# Altium PCB 智能睡眠枕.PcbDoc
Units mil, origin at the board's own origin, x right, y up, seen from the top; angles counter-clockwise.
Board outline 3890 x 5875 mil, 2 copper layers (Top Layer, Bottom Layer); 35 components, 43 nets, 196 pads, 6 vias.
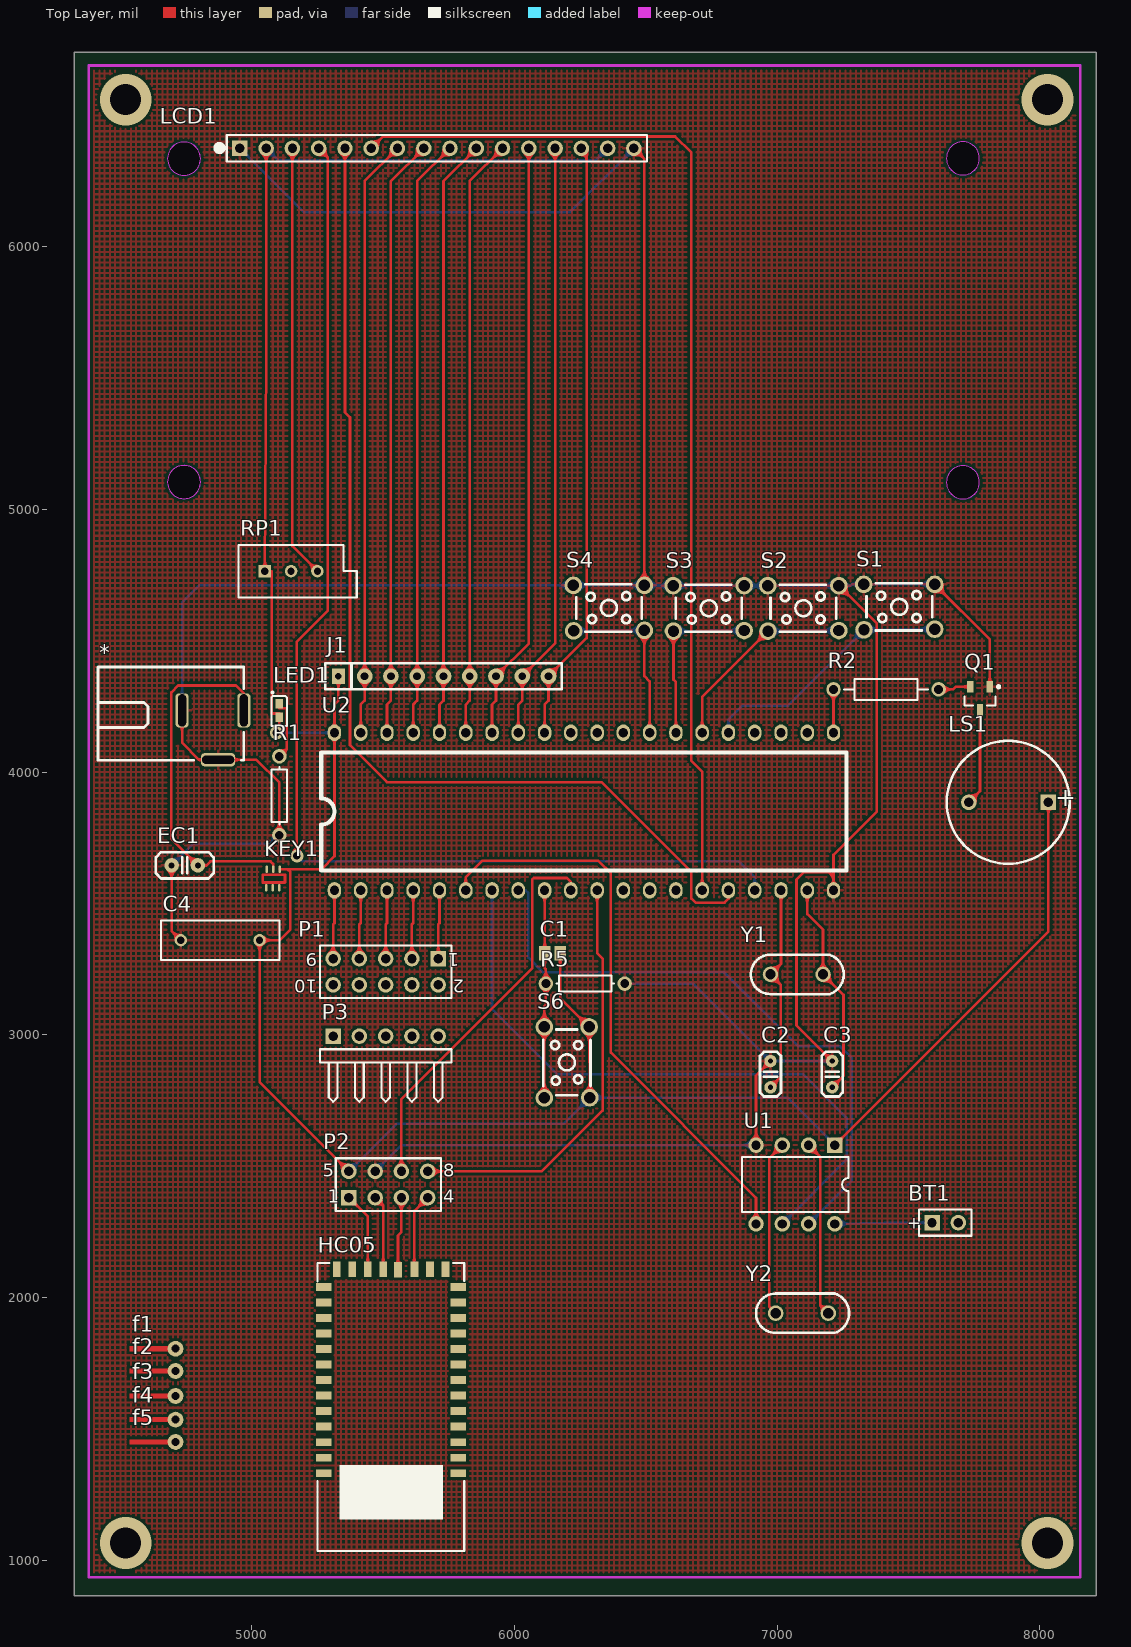
[diagram p0: Top Layer view]
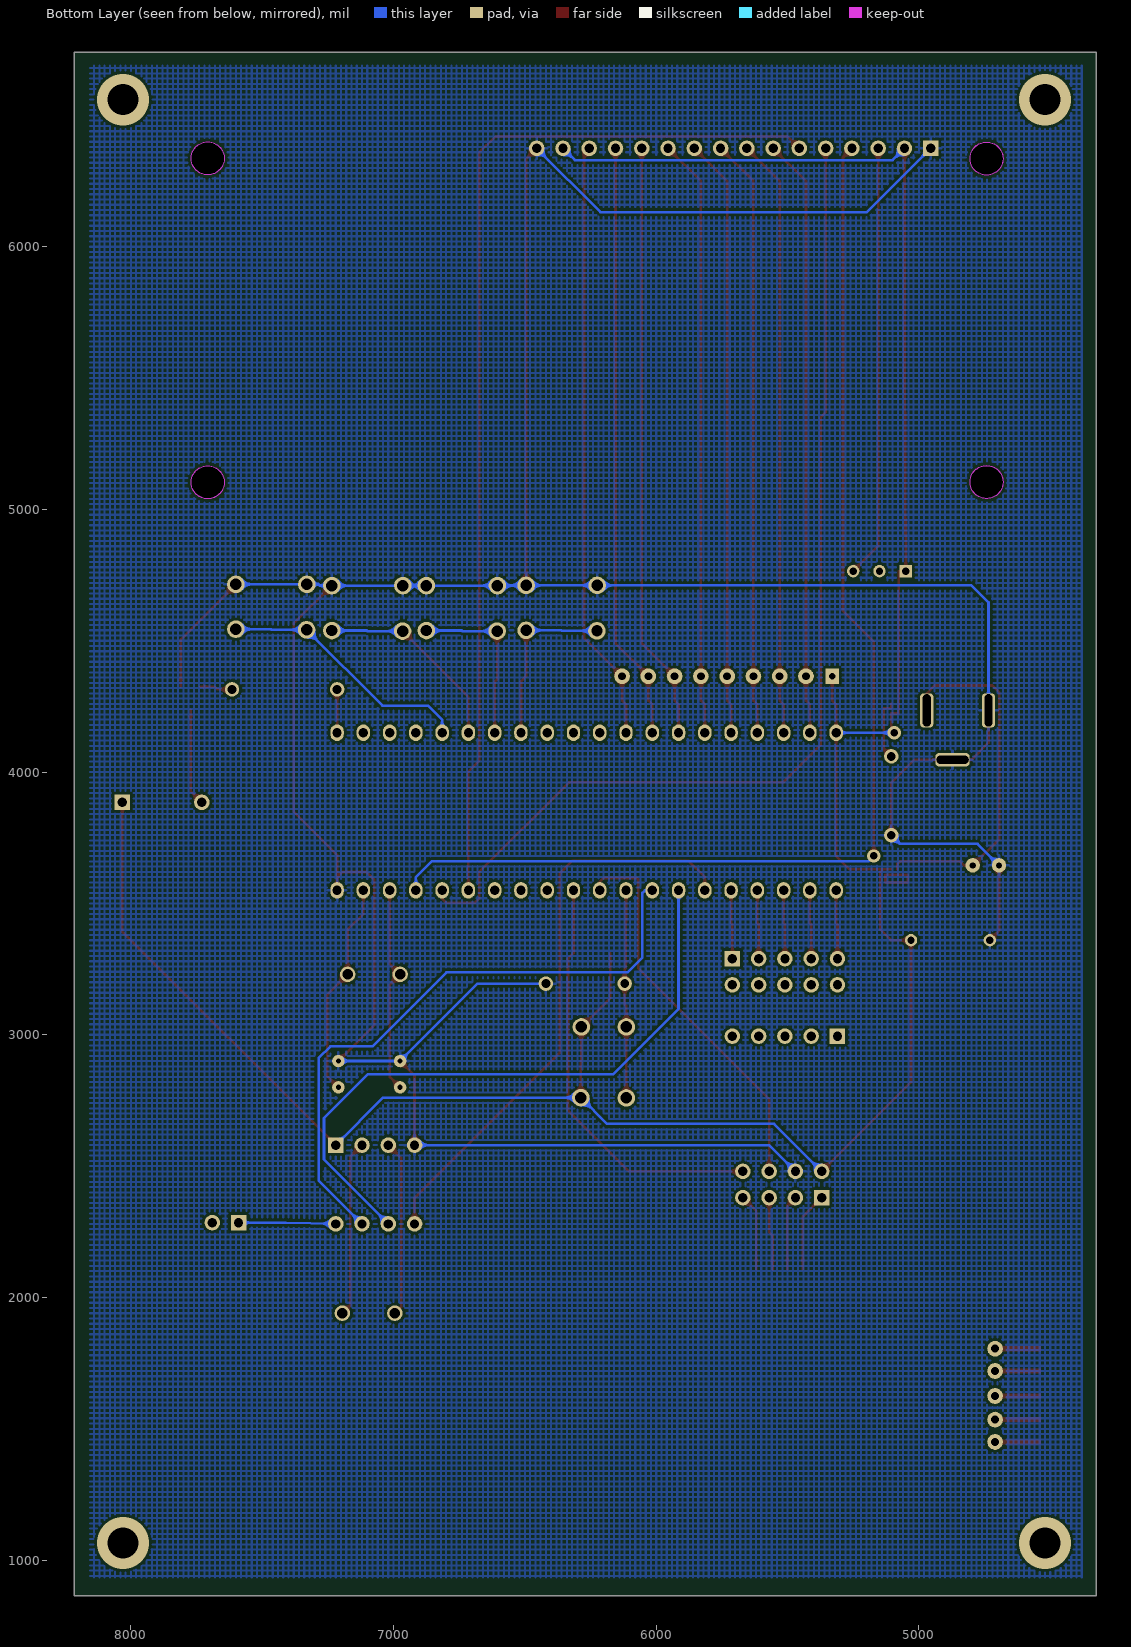
[diagram p1: Bottom Layer view, seen from below]

## Layer stack, top to bottom
Top Solder: solder mask 0.4, Solder Resist, Dk 3.5
Top Layer: signal copper 1.4
Dielectric 1: dielectric 12.6, FR-4, Dk 4.8
Bottom Layer: signal copper 1.4
Bottom Solder: solder mask 0.4, Solder Resist, Dk 3.5

## Board outline
4325,865 8215,865 8215,6740 4325,6740

## Design rules (kind name [scope] priority, off if disabled: settings)
Clearance [All] p1: gap=10 ignorepadtopadclearanceinfootprint=FALSE
PolygonConnect [All] p1: connectstyle=Relief reliefconductorwidth=10 reliefentries=4 polygonreliefangle="90 Angle" airgapwidth=10
RoutingVias [All] p1: holewidth=28 width=50 viastyle="Through Hole" minholewidth=28 minwidth=50 maxholewidth=28 maxwidth=50
SolderMaskExpansion [All] p1: expansion=4
Width [All] p1: maxlimit=10 minlimit=10 preferedwidth=10
30 further rules are at their usual default settings.

## Components (designator, comment, footprint, x,y, rotation, side; value= is the part's Value field where it differs from the comment)
* "Component_1" PCBComponent_1#1 4735,4235 r270 top
BT1 "Battery" BAT-2 7640,2285 r0 top
C1 "Cap Pol3" C0805 6145,3310 r180 top value=10uF
C2 "30P" Capacitor-Disk-Small 6975,2850 r270 top
C3 "30P" Capacitor-Disk-Small 7210,2850 r270 top
C4 "Cap" RAD-0.3 4880,3360 r0 top value=0.1uf/50v
EC1 "Cap Pol2" Capacitor-Disk-Middle 4795,3645 r180 top value=220uF/16V
f1 "fsr402" PCBComponent_1#2 4445,2380 r270 top
f2 "fsr402" PCBComponent_1#2 4445,2295 r270 top
f3 "fsr402" PCBComponent_1#2 4445,2200 r270 top
f4 "fsr402" PCBComponent_1#2 4445,2110 r270 top
f5 "fsr402" PCBComponent_1#2 4445,2025 r270 top
HC05 "U1" HC-0x 5786.81,1330.94 r180 top
J1 "10K" RES-PACK-DIP9 5330,4365 r90 top
KEY1 "Component_1" "PCBComponent_1 - duplicate1" 5176.89,3565 r90 top
LCD1 "LCD1602" LCD1602 5705,6375 r180 top
LED1 "LED Chip" CLED1005-0402 5105,4235 r90 top
LS1 "BUZZ" BUZZER_12*9.5 7730,3885 r0 top
P1 "Header 5X2" HDR2X5 5710,3290 r180 top
P2 "Header 4X2A" HDR2X4_CEN 5370,2380 r0 top
P3 "Header 5H" HDR1X5H 5310,2995 r0 top
Q1 "PNP" SOT-23B_N 7772.6,4280.71 r270 top
R1 "Res1" AXIAL-0.3 5105,3910 r90 top value=510/0.125w
R2 "2.2k" AXIAL-0.4-R 7415,4315 r180 top
R5 "10K" AXIAL-0.3 6270,3195 r180 top
RP1 "RPot" VR5 5150,4765 r0 top value=10K
S1 "Tactile Switch" BUTTON_6*6 7600.37,4544 r180 top
S2 "Tactile Switch" BUTTON_6*6 7235,4539 r180 top
S3 "Tactile Switch" BUTTON_6*6 6875,4539 r180 top
S4 "Tactile Switch" BUTTON_6*6 6495,4540 r180 top
S6 "Tactile Switch" BUTTON_6*6 6285,3030 r270 top
U1 "DS1302" DIP-8 7220,2580 r180 top
U2 "STC89C52_DIP" DIP-40 5315,3550 r0 top
Y1 "Crystal" cry卧式 6975,3230 r0 top
Y2 "32768" cry卧式 6995,1940 r0 top

## Footprints (in the part's own frame and the unit in brackets; to place one, negate y for a bottom-side part, rotate by r counter-clockwise, add the part's x,y. Pads: shape width x height; smd on the part's side, far side on the other; paste and mask are expansions set on the pad)
AXIAL-0.3 [mm] "Axial Device, Thru-Hole; 2 Leads; 0.3 in Pin Spacing"
  round 1.4 hole 0.85: 1(-3.81,0) 2(3.81,0)
  silkscreen extent -2.77,-0.76 2.77,0.76
AXIAL-0.4-R [mm] "1/4W/1/2W"
  round 1.4 hole 0.85: 1(-5.08,0) 2(5.08,0)
  silkscreen extent -4.06,-1.02 4.06,1.02, body extent -5.38,-1.26 5.38,1.26, height 2.48
BAT-2 [mm] "Battery; 2 Leads"
  rect 1.5x1.5 hole 0.9: 1(-1.27,0)
  round 1.5 hole 0.9: 2(1.27,0)
  silkscreen extent -2.54,-1.27 2.54,1.27
BUTTON_6*6 [mm] "轻触按键"
  round 1.7 hole 1.1: 1(0,0) 1(6.842,0.051) 2(0,-4.343) 2(6.867,-4.343)
  silkscreen extent 0.25,-4.44 6.6,0.13, body extent -0.48,-5.01 7.49,0.99, height 5.26
BUZZER_12*9.5 [mm] "12*9.5mm"
  rect 1.5x1.5 hole 0.9: 1(7.696,0)
  round 1.5 hole 0.9: 2(0,0)
  silkscreen extent -2.13,-5.94 9.75,5.94, body extent -2.14,-5.97 9.86,6.02, height 7.5
C0805 [mm] "Chip Capacitor, Body 2.0x1.3mm, IPC High Density"
  rect 1.1x1.4 smd: 1(-0.75,0) 2(0.75,0)
  body extent -1.1,-0.72 1.1,0.72, height 1.4
Capacitor-Disk-Middle [mm]
  round 1.4 hole 0.6: 1(0,0) 2(2.54,0)
  silkscreen extent -1.52,-1.27 4.06,1.27, body extent -1.23,-1.1 3.77,1, height 7
Capacitor-Disk-Small [mm]
  round 1.2 hole 0.5: 1(-1.27,0) 2(1.27,0)
  silkscreen extent -2.16,-1.02 2.16,1.02, body extent -2,-1.1 2,1, height 6.5
CLED1005-0402 [mm]
  rect 0.9x0.7 smd: 1(-0.65,0) 2(0.65,0)
  silkscreen extent -1.5,-0.75 1.78,0.75, body extent -0.5,-0.25 0.5,0.25, height 0.4
cry卧式 [mm]
  round 1.5 hole 1: 1(0,0) 2(5.08,0)
  silkscreen extent -1.9,-1.91 7.08,1.91, body extent -3.13,-2.32 8.22,2.33, height 3.78
DIP-8 [mm]
  rect 1.5x1.5 hole 0.9: 1(0,0)
  round 1.5 hole 0.9: 2(2.54,0) 3(5.08,0) 4(7.62,0) 5(7.62,7.62) 6(5.08,7.62) 7(2.54,7.62) 8(0,7.62)
  silkscreen extent -1.34,1.16 8.96,6.46, body extent -0.82,-0.22 8.45,7.84, height 3.8
DIP-40 [mm] "40脚直插芯片 间距2.54mm 600mil"
  oval 1.3x1.6 hole 0.9: 1(0,0) 2(2.54,0) 3(5.08,0) 4(7.62,0) 5(10.16,0) 6(12.7,0) 7(15.24,0) 8(17.78,0) 9(20.32,0) 10(22.86,0) 11(25.4,0) 12(27.94,0) 13(30.48,0) 14(33.02,0) 15(35.56,0) 16(38.1,0) 17(40.64,0) 18(43.18,0) 19(45.72,0) 20(48.26,0) 21(48.26,15.24) 22(45.72,15.24) 23(43.18,15.24) 24(40.64,15.24) 25(38.1,15.24) 26(35.56,15.24) 27(33.02,15.24) 28(30.48,15.24) 29(27.94,15.24) 30(25.4,15.24) 31(22.86,15.24) 32(20.32,15.24) 33(17.78,15.24) 34(15.24,15.24) 35(12.7,15.24) 36(10.16,15.24) 37(7.62,15.24) 38(5.08,15.24) 39(2.54,15.24) 40(0,15.24)
  silkscreen extent -1.27,1.91 49.53,13.33, body extent -1.22,-1.18 49.48,16.42, height 8.5
HC-0x [mm]
  rect 1.5x0.76 smd: 1(0,0) 2(0,-1.5) 3(0,-3) 4(0,-4.5) 5(0,-6) 6(0,-7.5) 7(0,-9) 8(0,-10.5) 9(0,-12) 10(0,-13.5) 11(0,-15) 12(0,-16.5) 13(0,-18) 22(13,-18) 23(13,-16.5) 24(13,-15) 25(13,-13.5) 26(13,-12) 27(13,-10.5) 28(13,-9) 29(13,-7.5) 30(13,-6) 31(13,-4.5) 32(13,-3) 33(13,-1.5) 34(13,0)
  rect 0.76x1.5 smd: 14(1.26,-19.73) 15(2.76,-19.73) 16(4.26,-19.73) 17(5.842,-19.685) 18(7.26,-19.73) 19(8.76,-19.73) 20(10.26,-19.73) 21(11.76,-19.73)
  silkscreen extent -0.57,-20.32 13.63,7.52
HDR1X5H [mm] "Connector; Header; 5 Position; Right Angle"
  rect 1.5x1.5 hole 0.9: 1(0,0)
  round 1.5 hole 0.9: 2(2.54,0) 3(5.08,0) 4(7.62,0) 5(10.16,0)
  silkscreen extent -1.27,-6.35 11.43,-1.27
HDR2X4_CEN [mm] "Connector; Header; 4x2 Position"
  rect 1.5x1.5 hole 0.9: 1(0,0)
  round 1.5 hole 0.9: 2(2.54,0) 3(5.08,0) 4(7.62,0) 5(0,2.54) 6(2.54,2.54) 7(5.08,2.54) 8(7.62,2.54)
  silkscreen extent -1.27,-1.27 8.89,3.81
HDR2X5 [mm] "Connector; Header; 5x2 Position"
  rect 1.5x1.5 hole 0.9: 1(0,0)
  round 1.5 hole 0.9: 2(0,2.54) 3(2.54,0) 4(2.54,2.54) 5(5.08,0) 6(5.08,2.54) 7(7.62,0) 8(7.62,2.54) 9(10.16,0) 10(10.16,2.54)
  silkscreen extent -1.27,-1.27 11.43,3.81
LCD1602 [mm] "LCD1602"
  rect 1.5x1.5 hole 0.9: 1(19.05,0)
  round 1.5 hole 0.9: 2(16.51,0) 3(13.97,0) 4(11.43,0) 5(8.89,0) 6(6.35,0) 7(3.81,0) 8(1.27,0) 9(-1.27,0) 10(-3.81,0) 11(-6.35,0) 12(-8.89,0) 13(-11.43,0) 14(-13.97,0) 15(-16.51,0) 16(-19.05,0)
  Keep-Out Layer circle w0.1: c-50.867,32.3 r1.6
  Keep-Out Layer circle w0.1: c-50.867,0.974 r1.6
  Keep-Out Layer circle w0.1: c24.451,1 r1.6
  Keep-Out Layer circle w0.1: c24.451,32.274 r1.6
  Keep-Out Layer board cut-out: -52.467,32.3 -52.345,31.687 -51.998,31.168 -51.479,30.821 -50.867,30.7 -50.867,30.7 -50.255,30.821 -49.736,31.168 -49.389,31.687 -49.267,32.3 -49.267,32.3 -49.389,32.912 -49.736,33.431 -50.255,33.778 -50.867,33.9 -50.867,33.9 -51.479,33.778 -51.998,33.431 -52.345,32.912 -52.467,32.3
  Keep-Out Layer board cut-out: -52.467,0.974 -52.345,0.362 -51.998,-0.157 -51.479,-0.504 -50.867,-0.626 -50.867,-0.626 -50.255,-0.504 -49.736,-0.157 -49.389,0.362 -49.267,0.974 -49.267,0.974 -49.389,1.587 -49.736,2.106 -50.255,2.453 -50.867,2.574 -50.867,2.574 -51.479,2.453 -51.998,2.106 -52.345,1.587 -52.467,0.974
  Keep-Out Layer board cut-out: 22.851,1 22.973,0.388 23.32,-0.132 23.839,-0.478 24.451,-0.6 24.451,-0.6 25.063,-0.478 25.582,-0.132 25.929,0.388 26.051,1 26.051,1 25.929,1.612 25.582,2.131 25.063,2.478 24.451,2.6 24.451,2.6 23.839,2.478 23.32,2.131 22.973,1.612 22.851,1
  Keep-Out Layer board cut-out: 22.851,32.274 22.973,31.662 23.32,31.143 23.839,30.796 24.451,30.674 24.451,30.674 25.063,30.796 25.582,31.143 25.929,31.662 26.051,32.274 26.051,32.274 25.929,32.886 25.582,33.406 25.063,33.752 24.451,33.874 24.451,33.874 23.839,33.752 23.32,33.406 22.973,32.886 22.851,32.274
  silkscreen extent -20.32,-1.27 21.47,1.27, body extent -53.46,-1.61 27.04,34.89, height 10.52
PCBComponent_1#1 [mil]
  rrect50% 129.92x50 hole 30 slot 122.05 at 0 deg: 1(0,235) 2(0,0)
  rrect50% 50x129.92 hole 30 slot 122.05 at 90 deg: 3(188,137)
  silkscreen extent -165,-320 190,235
PCBComponent_1#2 [mil]
  round 60 hole 30: 1(575,265)
  Top Layer region: 564.99,89.99 584.99,89.99 584.99,239.99 564.99,239.99
"PCBComponent_1 - duplicate1" [mil]
  oct 29.05x9.92 smd: 1(-5,121.89) 2(-5,96.89) 3(-5,71.89) 4(65,120) 5(65,95) 6(65,70)
  Top Layer lines w10: 15,135 15,50 45,50 45,135 15,135
RAD-0.3 [mm] "Radial Cap, Thru-Hole; 2 Leads; 0.3 in Pin Spacing"
  round 1.2 hole 0.7: 1(-3.81,0) 2(3.81,0)
  silkscreen extent -5.71,-1.91 5.71,1.91
RES-PACK-DIP9 [mil]
  rect 59.06x50 hole 25: 1(0,0)
  round 60 hole 30: 2(0,-100) 3(0,-200) 4(0,-300) 5(0,-400) 6(0,-500) 7(0,-600) 8(0,-700) 9(0,-800)
  silkscreen extent -50,-850 50,50, body extent -61,-832 59,31, height 459
SOT-23B_N [mm] "SOT23, 3-Leads, Body 2.9x1.3mm, Pitch 0.95mm, Lead Span 2.4mm, IPC Medium Density"
  rect 1.15x0.6 smd: 1(-1.125,0.95) 2(-1.125,-0.95) 3(1.125,0)
  silkscreen extent -1.25,-1.5 0.7,1.93, body extent -0.7,-1.5 0.7,1.5, height 1.14
VR5 [mm] "Thru-Hole; 3 Leads"
  rect 1.2x1.2 hole 0.7: 1(-2.54,0)
  round 1.2 hole 0.7: 2(0,0) 3(2.54,0)
  silkscreen extent -5.08,-2.54 6.35,2.54

## Part data
BT1: "Multicell Battery", LatestRevisionDate=17-Jul-2002, LatestRevisionNote="Re-released for DXP Platform.", PackageDescription="Battery; 2 Leads", PackageReference=BAT-2, Published=24-Mar-1999, Publisher="Altium Limited"
C1: "Polarized Capacitor (Surface Mount)", LatestRevisionDate=29-May-2009, LatestRevisionNote="IPC-7351 Footprint Added.", PackageDescription="Chip Capacitor", PackageReference=C0805, Published=8-Jun-2000, Publisher="Altium Limited"
C2 C3: library part CAP, "Capacitor"
C4: "Capacitor", LatestRevisionDate=17-Jul-2002, LatestRevisionNote="Re-released for DXP Platform.", PackageDescription="Radial Cap, Thru-Hole; 2 Leads; 0.3 in Pin Spacing", PackageReference=RAD-0.3, Published=8-Jun-2000, Publisher="Altium Limited"
EC1: "Polarized Capacitor (Axial)", LatestRevisionDate=17-Jul-2002, LatestRevisionNote="Re-released for DXP Platform.", PackageDescription="Polarized Capacitor; 2 Leads", PackageReference=POLAR0.8, Published=8-Jun-2000, Publisher="Altium Limited"
f1 f2 f3 f4 f5: library part COMPONENT_1
HC05: library part Component_1
J1: library part CON9, "Connector"
LED1: "Typical Chip LED", Published=8-Jun-2000, Publisher="Altium Limited", Revision="July-2002: Re-released for DXP Platform."
LS1: "蜂鸣器"
P1: "Header, 5-Pin, Dual row", LatestRevisionDate=17-Jul-2002, LatestRevisionNote="Re-released for DXP Platform.", Publisher="Altium Limited"
P2: "Header, 4-Pin, Dual row", LatestRevisionDate=17-Jul-2002, LatestRevisionNote="Re-released for DXP Platform.", Publisher="Altium Limited"
P3: "Header, 5-Pin, Right Angle", LatestRevisionDate=17-Jul-2002, LatestRevisionNote="Re-released for DXP Platform.", Publisher="Altium Limited"
Q1: "PNP Bipolar Transistor", LatestRevisionDate=29-May-2009, LatestRevisionNote="IPC-7351 Footprint Added.", PackageDescription="3-Pin SOT-23 Package 0.95 mm Pitch, 2.4 mm Lead Span", PackageReference=SOT-23B, PackageVersion=Aug-1999, Published=8-Jun-2000, Publisher="Altium Limited"
R1: "Resistor", LatestRevisionDate=17-Jul-2002, LatestRevisionNote="Re-released for DXP Platform.", PackageDescription="Axial Device, Thru-Hole; 2 Leads; 0.3 in Pin Spacing", PackageReference=AXIAL-0.3, Published=8-Jun-2000, Publisher="Altium Limited"
R2: library part Res2_1/4W, "Resistor 直插电阻 0.25W", LatestRevisionDate=17-Jul-2002, LatestRevisionNote="Re-released for DXP Platform.", PackageReference=AXIAL-0.4, Published=8-Jun-2000, Publisher="Altium Limited"
R5: library part RES2
RP1: "Potentiometer", LatestRevisionDate=17-Jul-2002, LatestRevisionNote="Re-released for DXP Platform.", PackageDescription="Variable Resistor, Thru-Hole; 3 Leads", PackageReference=VR5, Published=8-Jun-2000, Publisher="Altium Limited", Set Position=0.5, Sim Note="Enter the Resistance value and the set point into parameter fields."
S1 S2 S3 S4 S6: library part SW-PB, "Tactile Switch触觉开关", LatestRevisionDate=17-Jul-2002, LatestRevisionNote="Re-released for DXP Platform.", PackageReference=SPST-2, Published=24-Mar-1999, Publisher="Altium Limited"
U1: "Clock"
Y1: library part "Crystal 11.05292/12/16/24/MHz", "直插晶振11.05292/12/16/24/MHz"
Y2: library part "Crystal 11.05292/12/16/24/MHz_1", "柱状晶振32.768kHz"

## Via types
v1: diameter 196.85, hole 118.11, Top Layer to Bottom Layer, 4 vias
v2: diameter 50, hole 28, Top Layer to Bottom Layer, 2 vias

## Nets (pads, with @x,y where several pads share a name; then routed paths per layer and width w, separated by ;. In a path a pad name is that pad's centre, name@x,y a point inside that pad or via, vN(x,y) a via of type N, cw(c..) or ccw(c..) an arc to the next point about the centre after c; other vN are vias at no path point)
GND: *.2 *.3 C2.1 C3.1 C4.1 EC1.2 LCD1.1 LCD1.16 P2.6 Q1.1 R1.1 R5.1 S1.2 S2.2 S3.2 S4.2 U1.4 U2.20 | length 13621
  Top Layer w10: EC1.2 4695,3395 C4.1 ; *.2 4735,4112 4800,4047 *.3 5018,4047 5105,3960 R1.1 ; LCD1.16 6495,6335 S4.2@6495,4711 ; U1.4 6920,2845 C2.1 ; C3.1 7074,3036 7074,3591 7103,3620 7195,3620 7215,3600 ; U2.20 7215,3600 ; S2.2@7235,4710 7380,4565 7380,3850 7215,3685 7215,3600 ; S1.2@7600.37,4715 7810,4505.37 Q1.1
  Bottom Layer w10: EC1.2 4777,3727 5072,3727 R1.1 ; *.2 4735,4646 4800,4711 6224.63,4711 6495,4711 6549,4711 6550,4710 6604.63,4710 6875,4710 6964.63,4710 7235,4710 7280,4710 7285,4715 7330,4715 S1.2@7600.37,4715 ; LCD1.1 5198,6132 6212,6132 LCD1.16 ; P2.6 5570,2580 U1.4 ; R5.1 6680,3195 C2.1 C3.1
LCDEN: LCD1.6 U2.15 | length 4088.3
  Top Layer w10: LCD1.6 5500,6420 6612,6420 6674,6358 6674,4043 6715,4002 U2.15
NetBT1_1: BT1.1 U1.8 | length 370.1
  Bottom Layer w10: U1.8 7410,2285 BT1.1
NetC1_2: C1.2 R5.2 S6.2 U2.9 | length 794.9
  Top Layer w10: S6.2@6114,2759.63 6114,3030 6114,3109 6120,3115 R5.2 6120,3250 6115.47,3254.53 C1.2 6115.47,3429 6115,3429.47 U2.9
NetC2_2: C2.2 U2.18 Y1.1 | length 798.9
  Top Layer w10: C2.2 7014,2839 7014,3191 Y1.1 7015,3270 U2.18
NetC3_2: C3.2 U2.19 Y1.2 | length 825
  Top Layer w10: U2.19 7115,3460 7175,3400 Y1.2 7253,3152 7253,2843 C3.2
NetHC05_16: HC05.16 P2.4 | length 293.4
  Top Layer w10: HC05.16 5619.09,2329.09 P2.4
NetHC05_17: HC05.17 P2.3 | length 279.5
  Top Layer w10: HC05.17 5556.81,2236 5570,2249.19 P2.3
NetHC05_18: HC05.18 P2.2 | length 285.1
  Top Layer w10: P2.2 5500.98,2349.02 HC05.18
NetHC05_19: HC05.19 P2.1 | length 302.1
  Top Layer w10: P2.1 5441.93,2308.07 HC05.19
NetJ1_2: J1.2 LCD1.7 U2.39 | length 2283
  Top Layer w10: U2.39 5415,4257 5430,4272 J1.2 5430,6250 LCD1.7
NetJ1_3: J1.3 LCD1.8 U2.38 | length 2283
  Top Layer w10: U2.38 5515,4257 5530,4272 J1.3 5530,6250 LCD1.8
NetJ1_4: J1.4 LCD1.9 U2.37 | length 2283
  Top Layer w10: U2.37 5615,4257 5630,4272 J1.4 5630,6250 LCD1.9
NetJ1_5: J1.5 LCD1.10 U2.36 | length 2283
  Top Layer w10: U2.36 5715,4257 5730,4272 J1.5 5730,6250 LCD1.10
NetJ1_6: J1.6 LCD1.11 U2.35 | length 2283
  Top Layer w10: U2.35 5815,4257 5830,4272 J1.6 5830,6250 LCD1.11
NetJ1_7: J1.7 LCD1.12 U2.34 | length 2283
  Top Layer w10: U2.34 5915,4257 5930,4272 J1.7 6055,4490 LCD1.12
NetJ1_8: J1.8 LCD1.13 U2.33 | length 2283
  Top Layer w10: U2.33 6015,4257 6030,4272 J1.8 6155,4490 LCD1.13
NetJ1_9: J1.9 LCD1.14 U2.32 | length 2311.3
  Top Layer w10: U2.32 6115,4257 6130,4272 J1.9 6275,4510 6275,6375 LCD1.14
NetLCD1_3: LCD1.3 RP1.3 | length 1649.4
  Top Layer w10: LCD1.3 5155,4860 RP1.3
NetLED1_2: LED1.2 R1.2 | length 241.6
  Top Layer w10: R1.2 5134,4089 5134,4243.17 5105,4243.17 LED1.2
NetLS1_2: LS1.2 Q1.3 | length 369.1
  Top Layer w10: LS1.2 7772.6,3927.6 Q1.3
NetP1_1: P1.1 U2.5 | length 262.1
  Top Layer w10: P1.1 5710,3420 5715,3425 U2.5
NetP1_3: P1.3 U2.4 | length 262.1
  Top Layer w10: P1.3 5610,3420 5615,3425 U2.4
NetP1_5: P1.5 U2.3 | length 262.1
  Top Layer w10: P1.5 5510,3420 5515,3425 U2.3
NetP1_7: P1.7 U2.2 | length 262.1
  Top Layer w10: P1.7 5410,3420 5415,3425 U2.2
NetP1_9: P1.9 U2.1 | length 262.1
  Top Layer w10: P1.9 5310,3420 5315,3425 U2.1
NetP2_7: P2.7 U2.10 | length 1505
  Top Layer w10: P2.7 5570,2755 6068,3253 6068,3591 6074,3597 6200,3597 6215,3582 U2.10
NetP2_8: P2.8 U2.11 | length 1608.8
  Top Layer w10: P2.8 6104,2480 6336,2712 6336,3290 6315,3311 U2.11
NetQ1_2: Q1.2 R2.1 | length 124.3
  Top Layer w10: R2.1 7670,4315 7680,4325 Q1.2
NetR2_2: R2.2 U2.21 | length 165
  Top Layer w10: U2.21 R2.2
NetS1_1: S1.1 U2.25 | length 977.9
  Bottom Layer w10: U2.25 6815,4200 6868,4253 7042,4253 7331,4542 7464,4542 7466,4544 S1.1@7600.37,4544
NetS2_1: S2.1 U2.26 | length 761
  Top Layer w10: U2.26 6715,4286.37 S2.1@6965.63,4537
  Bottom Layer w10: S2.1@6965.63,4537 7099,4537 7101,4539 S2.1@7235,4539
NetS3_1: S3.1 U2.27 | length 661.1
  Top Layer w10: S3.1@6605.63,4537 6605.63,4352.37 6615,4343 U2.27
  Bottom Layer w10: S3.1@6605.63,4537 6739,4537 6741,4539 S3.1@6875,4539
NetS4_1: S4.1 U2.28 | length 668.5
  Top Layer w10: S4.1@6495,4540 6495,4365 6515,4345 U2.28
  Bottom Layer w10: S4.1@6225.63,4538 6359,4538 6361,4540 S4.1@6495,4540
NetU1_2: U1.2 Y2.2 | length 671.1
  Top Layer w10: U1.2 7165,2535 7165,1970 Y2.2
NetU1_3: U1.3 Y2.1 | length 670.2
  Top Layer w10: Y2.1 6971,1964 6971,2531 U1.3
NetU1_5: U1.5 U2.6 | length 2211.2
  Top Layer w10: U2.6 5815,3600 5877,3662 6320,3662 6367,3615 6367,2932 6920,2379 U1.5
NetU1_6: U1.6 U2.7 | length 2478.4
  Bottom Layer w10: U2.7 5915,3098 6163,2850 7098,2850 7265,2683 7265,2525 U1.6
NetU1_7: U1.7 U2.8 | length 2378.1
  Bottom Layer w10: U2.8 6043,3550 6053,3540 6053,3294 6109,3238 6799,3238 7081,2956 7240,2956 7285,2911 7285,2445 U1.7
RS: LCD1.4 U2.17 | length 4583.1
  Top Layer w10: v2(5172,3681) 5172,4497 5289,4614 5289,6341 LCD1.4
  Bottom Layer w10: v2(5172,3681) 5192,3661 6854,3661 6915,3600 U2.17
VCC: C1.1 C4.2 J1.1 KEY1.6 LCD1.2 LCD1.15 LED1.1 LS1.1 P2.5 RP1.1 S6.1 U1.1 U2.40 | length 10430.2
  Top Layer w10: LCD1.2 5055,5575 RP1.1 5076,4765 5076,4223 5105,4223 LED1.1 5105,4161 v2(5094,4150) ; KEY1.6 5137,3630 ; J1.1 5330,4273 5315,4258 U2.40 5315,3680 5265,3630 5137,3630 ; P2.5 5030,2820 C4.2 5107,3360 5147,3400 5147,3620 5137,3630 ; C1.1 6174.53,3140.47 6285,3030 6285,2896 6287,2894 S6.1@6287,2760.63 ; U1.1 8033,3393 LS1.1
  Bottom Layer w10: LCD1.2 5100,6330 6310,6330 LCD1.15 ; v2(5094,4150) U2.40 ; P2.5 5551,2661 6187.37,2661 6287,2760.63 7039.37,2760.63 U1.1
VDD: *.1 EC1.1 KEY1.5 | length 1382.3
  Top Layer w10: *.1 4970,4300 4940,4330 4720,4330 4694,4304 4694,3746 EC1.1 4828,3645 4843,3660 5071.89,3660 5081.89,3650 KEY1.5
WR: LCD1.5 U2.16 | length 4066.2
  Top Layer w10: LCD1.5 5355,5370 5374,5351 5374,4103 5515,3962 6331,3962 6674,3619 6674,3519 6690,3503 6800,3503 6815,3518 U2.16
pads on no net: BT1.2 f1.1 f2.1 f3.1 f4.1 f5.1 HC05.1 HC05.2 HC05.3 HC05.4 HC05.5 HC05.6 HC05.7 HC05.8 HC05.9 HC05.10 HC05.11 HC05.12 HC05.13 HC05.14 HC05.15 HC05.20 HC05.21 HC05.22 HC05.23 HC05.24 HC05.25 HC05.26 HC05.27 HC05.28 HC05.29 HC05.30 HC05.31 HC05.32 HC05.33 HC05.34 KEY1.1 KEY1.2 KEY1.3 KEY1.4 P1.2 P1.4 P1.6 P1.8 P1.10 P3.1 P3.2 P3.3 P3.4 P3.5 RP1.2 U2.12 U2.13 U2.14 U2.22 U2.23 U2.24 U2.29 U2.30 U2.31
copper on no net:
  other v1: 4520,1065 8030,1065 4520,6560 8030,6560

## Polygon pours and split planes (outlines as drawn)
GND on Top Layer "Bottom Layer-No Net" (hatched 90Degree grid 20 track 8, remove dead copper, pour order 12): 4380,6690 8155,6690 8155,935 4380,935
GND on Bottom Layer "Bottom Layer-No Net" (hatched 90Degree grid 20 track 8, remove dead copper, pour order 16): 4380,6690 8155,6690 8155,935 4380,935

## Keep-outs
Top Layer:
  lines w10: 4380,935 8155,935 8155,6690 4380,6690 4380,935

## Silkscreen, mask and mechanical layers (free items; w line width, h text height)
Mechanical 1:
  the board outline again, w10

## Text inside footprints (layer, text, board x,y; h text height)
BT1: Top Overlay "+" at 7495.51,2262.28 h45.28
LS1: Top Overlay "+" at 8060,3870 h70
P1: Top Overlay "2" at 5810,3210 h50 r180; Top Overlay "1" at 5790,3310 h50 r180; Top Overlay "9" at 5250,3310 h50 r180; Top Overlay "10" at 5250,3210 h50 r180
P2: Top Overlay "8" at 5730,2460 h50; Top Overlay "4" at 5730,2360 h50; Top Overlay "1" at 5290,2360 h50; Top Overlay "5" at 5270,2460 h50